# EAGLE board schemat (EAGLE 8.4.2)
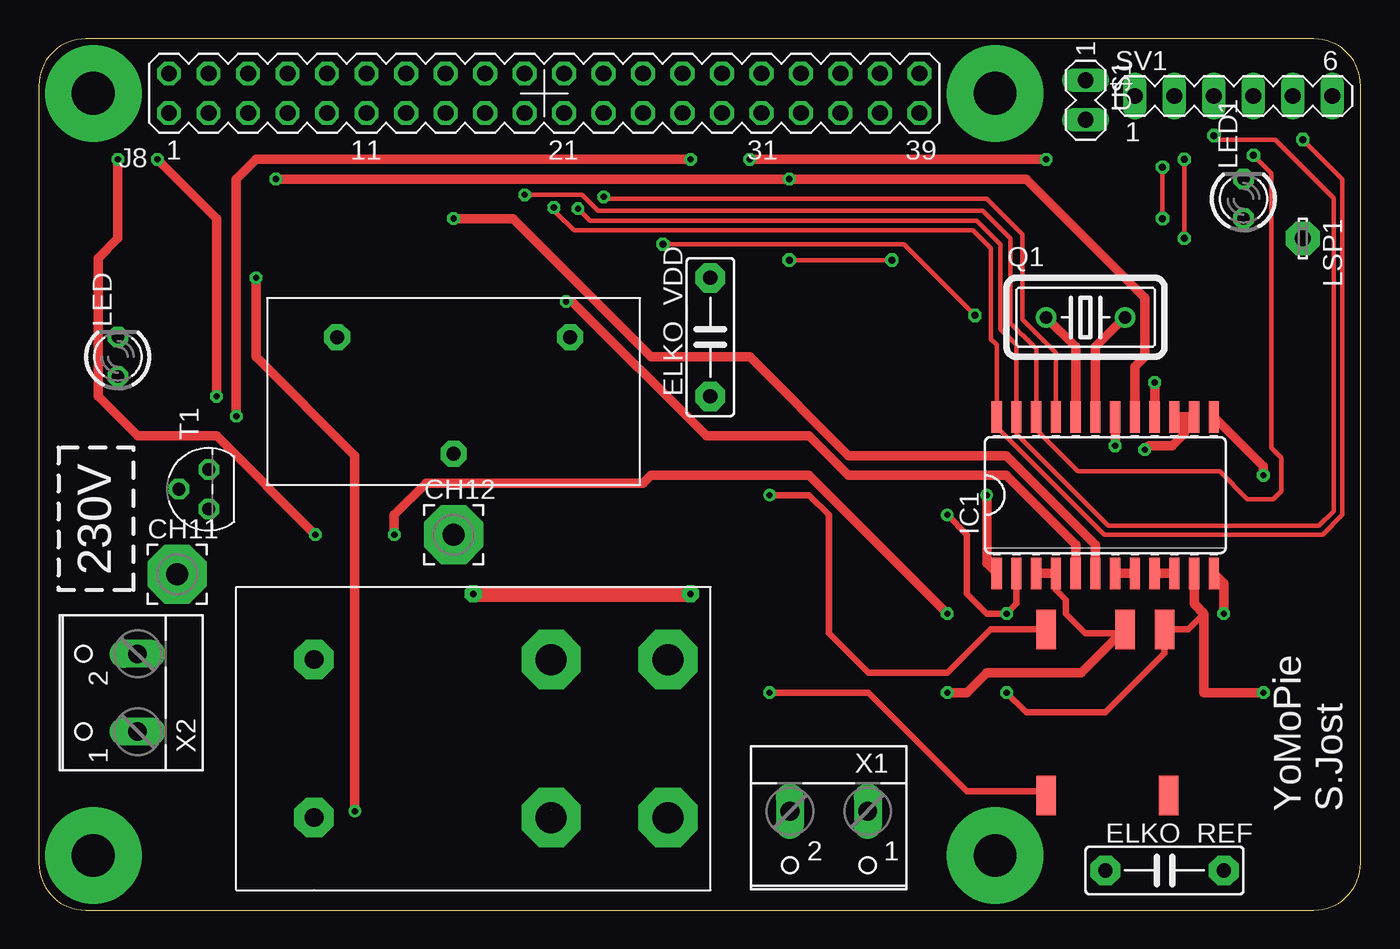
[diagram p0: board, top side]
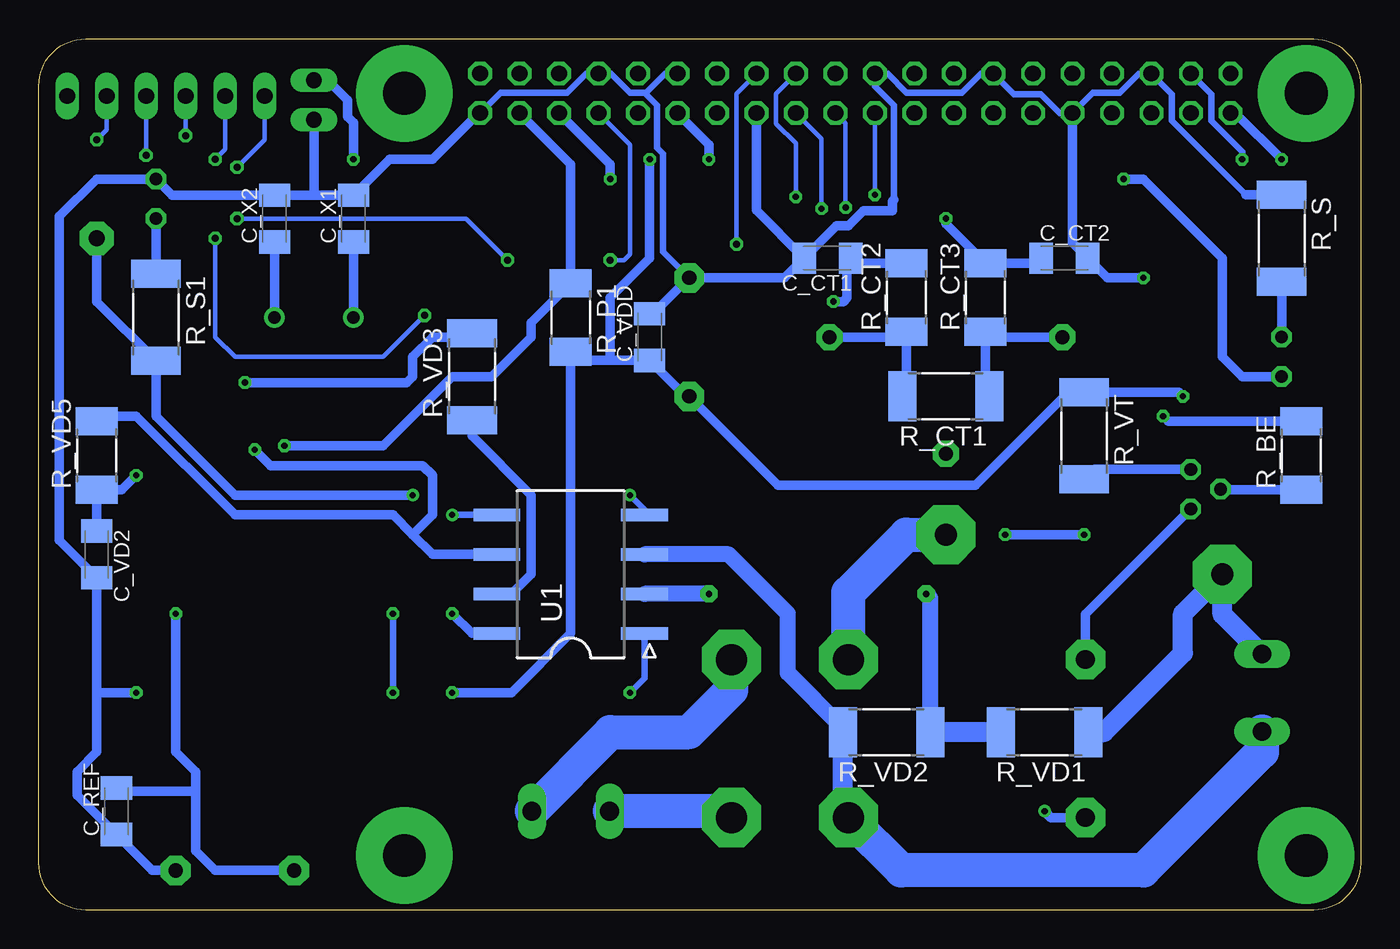
[diagram p1: board, bottom side, seen from below]

Size 85 x 56 mm. Coordinates in mm from the lower left corner, seen from the top.
Copper layers (1*16): Top 0.035mm / dielectric 1.5mm / Bottom 0.035mm
Design rules "default *": minimum track width 10mil, minimum drill 0.4mm, track to track 10mil, track to pad 10mil, pad to pad 10mil, via to via 10mil, smd to smd 6mil, copper to edge 40mil, drill to drill 6mil, minimum pad ring 10mil, minimum via ring 8mil, stop-mask expansion 4mil, vias tented up to drill 0mil, thermal gap 10mil

## Footprints (pad centres in the part's own frame; a part is rotated, then mirrored left to right if it is on the bottom)
C1206K = smd 1.5 x 2: 1 -1.5,0; 2 1.5,0
3,81/1,4 = drill 1.397 pad 3.81 octagon: 1 0,0
C7.5B3 = drill 0.914 pad 1.905 octagon: 1 -3.81,0; 2 3.81,0
SO24L = smd 0.66 x 2.032: 1 -6.985,-5.029; 2 -5.715,-5.029; 3 -4.445,-5.029; 4 -3.175,-5.029; 5 -1.905,-5.029; 6 -0.635,-5.029; 7 0.635,-5.029; 8 1.905,-5.029; 9 3.175,-5.029; 10 4.445,-5.029; 11 5.715,-5.029; 12 6.985,-5.029; 13 6.985,5.029; 14 5.715,5.029; 15 4.445,5.029; 16 3.175,5.029; 17 1.905,5.029; 18 0.635,5.029; 19 -0.635,5.029; 20 -1.905,5.029; 21 -3.175,5.029; 22 -4.445,5.029; 23 -5.715,5.029; 24 -6.985,5.029
LED3MM = drill 0.813 octagon: A -1.27,0; K 1.27,0
LSP10 = drill 1.016 pad 2.159 octagon: MP 0,0
RASPBERRY_PI_BPLUS_DIM = drill 1.016 octagon: 1 8.37,51.23; 2 8.37,53.77; 3 10.91,51.23; 4 10.91,53.77; 5 13.45,51.23; 6 13.45,53.77; 7 15.99,51.23; 8 15.99,53.77; 9 18.53,51.23; 10 18.53,53.77; 11 21.07,51.23; 12 21.07,53.77; 13 23.61,51.23; 14 23.61,53.77; 15 26.15,51.23; 16 26.15,53.77; 17 28.69,51.23; 18 28.69,53.77; 19 31.23,51.23; 20 31.23,53.77; 21 33.77,51.23; 22 33.77,53.77; 23 36.31,51.23; 24 36.31,53.77; 25 38.85,51.23; 26 38.85,53.77; 27 41.39,51.23; 28 41.39,53.77; 29 43.93,51.23; 30 43.93,53.77; 31 46.47,51.23; 32 46.47,53.77; 33 49.01,51.23; 34 49.01,53.77; 35 51.55,51.23; 36 51.55,53.77; 37 54.09,51.23; 38 54.09,53.77; 39 56.63,51.23; 40 56.63,53.77 | drill 2.75 pad 6.2: PE_BL 3.5,3.5; PE_BR 61.5,3.5; PE_TL 3.5,52.5; PE_TR 61.5,52.5
HC18U-V = drill 0.813: 1 -2.54,0; 2 2.54,0
R2010 = smd 1.8 x 2.7: 1 -2.2,0; 2 2.2,0
R2512 = smd 1.8 x 3.2: 1 -2.8,0; 2 2.8,0
MA06-1 = drill 1.016 long: 1 -6.35,0; 2 -3.81,0; 3 -1.27,0; 4 1.27,0; 5 3.81,0; 6 6.35,0
TO92 = drill 0.813 octagon: 1 1.27,0; 2 0,1.905; 3 -1.27,0
DIP8-GULLWING = smd 0.8 x 3: 1 -3.81,-4.753; 2 -1.27,-4.753; 3 1.27,-4.753; 4 3.81,-4.753; 5 3.81,4.753; 6 1.27,4.753; 7 -1.27,4.753; 8 -3.81,4.753
2-PINHEAD = drill 1.016 long: 1 -1.27,0; 2 1.27,0
CST1020 = drill 0.9 pad 1.676 octagon: 1 7.5,0; 2 -7.5,0; P$3 0,-7.5
0511 = smd 1.27 x 2.54: +VIN -1.27,-5.334; +VOUT 3.81,5.334; -VIN -3.81,-5.334; -VOUT 3.81,-5.334; P$6 -4.064,5.334
G4W-2212P-US-TV5 = drill 2 pad 3.81 octagon: 1 27.76,14.83; 2 27.76,4.67; 3 20.24,14.83; 4 20.24,4.67 | drill 1.2 pad 2.54 octagon: 5 5,14.83; 6 5,4.67
W237-102 = drill 1.194 long: 1 -2.5,-1.27; 2 2.5,-1.27

## Placement (x,y rotation side)
C_CT1  33n  [C1206K]  34.29,41.91 180 bottom
C_CT2  33n  [C1206K]  19.05,41.91 0 bottom
C_REF  100n  [C1206K]  80.01,6.35 90 bottom
C_VD2  33n  [C1206K]  81.28,22.86 270 bottom
C_VDD  100n  [C1206K]  45.72,36.83 90 bottom
C_X1  22p  [C1206K]  64.77,44.45 90 bottom
C_X2  22p  [C1206K]  69.85,44.45 90 bottom
CH11  WIREPAD3,81/1,4  [3,81/1,4]  8.89,21.59 0 top
CH12  WIREPAD3,81/1,4  [3,81/1,4]  26.67,24.13 0 top
ELKO_REF  10u  [C7.5B3]  72.39,2.54 0 top
ELKO_VDD  10u  [C7.5B3]  43.18,36.83 90 top
IC1  ADE7754  [SO24L]  68.58,26.67 0 top
LED  [LED3MM]  5.08,35.56 90 top
LED1  [LED3MM]  77.47,45.72 90 top
LSP1  LSP10  [LSP10]  81.28,43.18 270 top
PCB1  RASPBERRY_PI_B+_DIM  [RASPBERRY_PI_BPLUS_DIM]  0,0 0 top
Q1  [HC18U-V]  67.31,38.1 0 top
R_BE  1k  [R2010]  3.81,29.21 90 bottom
R_CT1  26  [R2512]  26.67,33.02 180 bottom
R_CT2  1k  [R2010]  29.21,39.37 90 bottom
R_CT3  1k  [R2010]  24.13,39.37 90 bottom
R_P1  100k  [R2010]  50.8,38.1 270 bottom
R_S  2k2  [R2512]  5.08,43.18 270 bottom
R_S1  825  [R2512]  77.47,38.1 270 bottom
R_VD1  1M  [R2512]  20.32,11.43 180 bottom
R_VD2  810  [R2512]  30.48,11.43 180 bottom
R_VD3  5k6  [R2512]  57.15,34.29 90 bottom
R_VD5  1k  [R2010]  81.28,29.21 90 bottom
R_VT  20  [R2512]  17.78,30.48 270 bottom
SV1  [MA06-1]  76.83,52.32 0 top
T1  2N3904  [TO92]  10.92,27.05 90 top
U1  AMC1100DUB  [DIP8-GULLWING]  50.8,21.59 90 bottom
U$1  2-PINHEAD  [2-PINHEAD]  67.31,52.07 270 top
U$2  CST-1020  [CST1020]  26.67,36.83 0 top
U$3  TES1-0511  [0511]  68.58,12.7 180 top
U$4  G4W-2212P-US-TV5  [G4W-2212P-US-TV5]  12.7,1.27 0 top
X1  [W237-102]  50.8,5.08 180 top
X2  [W237-102]  5.08,13.97 90 top

## Library data of the parts
C_CT1 C_CT2 C_REF C_VD2 C_VDD C_X1 C_X2 R_BE R_CT1-R_CT3 R_P1 R_S R_S1 R_VD1-R_VD3 R_VD5 R_VT = resistor
CH11 CH12 = wirepad
ELKO_REF ELKO_VDD = capacitor-wima
IC1 = ADE7754
LED LED1 = led
LSP1 = solpad
PCB1 = RASPBERRY_PI_Bplus-eagle5
Q1 = crystal; OC_FARNELL: unknown; OC_NEWARK: unknown
SV1 = con-lstb; OC_FARNELL: unknown; OC_NEWARK: unknown
T1 = transistor
U1 = _hhn_AMC1100_ISO7240_ADS130
U$1 = 2-PINHEAD
U$2 = cst
U$3 = TES1-0511
U$4 = power_relay
X1 X2 = con-wago-500; MPN: 237-102; OC_FARNELL: unknown; OC_NEWARK: 70K9898

## Nets
3V3: PCB1.17
5V0: PCB1.2
+3V3: PCB1.1 U1.8
+5V: C_VDD.1 ELKO_VDD.1 IC1.3 IC1.4 PCB1.4 R_P1.2 R_VT.1 U$1.1 U$3.+VIN
CE: PCB1.33 SV1.1
CS: IC1.21 PCB1.24
CSE: PCB1.26 SV1.2
DIN: IC1.22 PCB1.19 SV1.4
DOUT: IC1.24 PCB1.21 SV1.5
GND: C_CT1.2 C_CT2.2 C_REF.1 C_VD2.2 C_VDD.2 C_X1.2 C_X2.2 ELKO_REF.2 ELKO_VDD.2 IC1.2 IC1.11 LED1.K PCB1.6 PCB1.9 PCB1.14 PCB1.20 PCB1.25 PCB1.30 PCB1.34 PCB1.39 R_S.1 U1.5 U$1.2 U$3.-VIN U$4.6
IRQ: IC1.18 PCB1.37 R_P1.1
N$1: C_REF.2 ELKO_REF.1 IC1.12
N$2: U$4.1 X1.1
N$3: C_VD2.1 IC1.13 R_VD5.1
N$4: R_BE.1 T1.2
N$5: U$4.2 X1.2
N$6: CH12.1 U$4.3
N$7: IC1.1 LSP1.MP R_S1.2
N$8: CH11.1 R_VD1.1 X2.2
N$9: R_VT.2 T1.1
N$10: LED1.A R_S1.1
N$11: T1.3 U$4.5
N$12: R_VD1.2 R_VD2.1 U1.2
N$13: IC1.7 IC1.8
N$14: IC1.9 IC1.10
N$17: R_CT1.2 R_CT2.1 U$2.1
N$18: SV1.6
N$26: R_VD3.1 U1.7
N$28: LED.K R_S.2
N$39: U1.1 U$3.+VOUT
N$40: U1.4 U$3.-VOUT
N$80: R_CT1.1 R_CT3.1 U$2.2
N$97: C_CT2.1 IC1.6 R_CT3.2
N$98: C_CT1.1 IC1.5 R_CT2.2
N$102: C_X1.1 IC1.20 Q1.1
N$103: C_X2.1 IC1.19 Q1.2
RELAY: PCB1.29 R_BE.2
RESET: IC1.17 LED.A PCB1.35
SCLK: IC1.23 PCB1.23 SV1.3
V2N: IC1.14 IC1.15 R_VD5.2 U1.6
V2P: IC1.16 R_VD3.2
VSP: R_VD2.2 U1.3 U$4.4 X2.1

## Tracks (layer width: path | path; a pad name or v marks a point on that pad's centre or on a via)
+3V3  (via drill 0.4)
  Top 0.61: v5.08,48.26 5.08,43.18 3.81,41.91 3.81,33.02 6.35,30.48 11.43,30.48 v17.78,24.13 | v22.86,24.13 22.86,25.4 24.89,27.43 38.86,27.43 39.37,27.94 49.53,27.94 v58.42,19.05
  Bottom 0.61: PCB1.1 8.05,51.23 v5.08,48.26 | v17.78,24.13 v22.86,24.13 | v58.42,19.05 57.15,17.78 U1.8
+5V  (via drill 0.4)
  Top 0.406: U$3.+VIN 69.6,17.78 67.31,17.78 66.04,19.05 66.04,19.94 65.41,20.57 IC1.4
  Top 0.61: v11.43,33.02 11.43,44.45 v7.62,48.26 | IC1.4 IC1.3 | v58.42,13.97 59.69,13.97 60.96,15.24 67.06,15.24 69.6,17.78 | v45.72,48.26 v64.77,48.26
  Bottom 0.406: v7.62,48.26 7.62,48.76 9.59,50.73 9.59,52.45 PCB1.4
  Bottom 0.61: v11.43,33.02 11.69,33.28 R_VT.1 18.79,33.28 24.77,27.3 37.46,27.3 ELKO_VDD.1 43.41,33.02 C_VDD.1 48.26,35.33 | v58.42,13.97 54.61,13.97 50.8,17.78 R_P1.2 50.23,35.33 48.26,35.33 | 48.26,35.33 48.26,39.37 45.72,41.91 v45.72,48.26 | v64.77,48.26 64.77,50.6 65.16,50.98 65.16,52.07 66.43,53.34 U$1.1
CE  (via drill 0.45)
  Top 0.305: v48.26,41.78 54.74,41.78 v54.86,41.78 | v72.26,44.45 v72.26,47.75
  Bottom 0.305: PCB1.33 46.99,49.21 46.99,48.26 46.99,42.16 47.37,41.78 48.13,41.78 v48.26,41.78 | v54.86,41.78 57.53,44.45 v72.26,44.45 | v72.26,47.75 70.48,49.53 SV1.1
CS  (via drill 0.4)
  Top 0.305: IC1.21 65.41,35.81 63.25,37.97 63.25,43.43 60.96,45.72 36.32,45.72
  Top 0.61: 36.32,45.72 v36.32,45.85
  Bottom 0.305: v36.32,45.85 36.32,49.28 37.59,50.55 37.59,52.49 PCB1.24
CSE  (via drill 0.45)
  Top 0.305: v40.13,42.8 55.63,42.8 v60.2,38.23 | v73.66,43.18 v73.66,48.26
  Bottom 0.305: PCB1.26 40.13,52.49 v40.13,42.8 | v60.2,38.23 62.86,35.56 72.39,35.56 73.66,36.83 v73.66,43.18 | v73.66,48.26 73.02,48.9 SV1.2
DIN  (via drill 0.4, 0.45)
  Top 0.305: 64.13,31.88 IC1.22 | 64.13,31.88 64.13,36.08 64.02,36.2 64.01,36.2 62.48,37.72 62.48,43.18 60.71,44.96 35.94,44.96 34.93,45.97 v31.24,45.97 | v78.11,48.51 79.25,47.37 79.25,29.72 79.88,29.08 79.88,26.92 79.38,26.42 77.72,26.42 75.95,28.19 66.8,28.19 64.13,30.86 64.13,31.88
  Bottom 0.305: PCB1.19 31.24,51.22 v31.24,45.97 | SV1.4 78.11,49.78 v78.11,48.51
DOUT  (via drill 0.4, 0.45)
  Top 0.305: v33.12,45.16 33.27,45.01 33.27,44.83 34.42,43.69 60.07,43.69 61.21,42.55 61.21,36.7 61.59,36.32 IC1.24 61.59,31.05 68.51,24.13 82.55,24.13 83.83,25.41 83.83,46.98 v81.28,49.53
  Bottom 0.305: v33.12,45.16 33.12,50.58 PCB1.21 | SV1.5 80.64,50.16 v81.28,49.53
GND  (via drill 0.4)
  Top 0.406: 74.93,19.05 73.91,18.03 U$3.-VIN 72.39,16.51 68.58,12.7 63.5,12.7 v62.23,13.97 | IC1.2 62.86,19.69 v62.23,19.05 60.96,19.05 59.69,20.32 59.69,24.13 v58.42,25.4
  Top 0.61: v20.32,6.35 20.32,29.21 13.97,35.56 v13.97,40.64 | v78.74,13.97 74.93,13.97 74.93,19.05 74.3,19.69 IC1.11
  Bottom 0.406: 7.38,45.98 12.13,50.73 12.13,52.45 PCB1.6 14.27,53.77 15.49,52.55 17.21,52.55 PCB1.9 19.35,51.23 20.57,52.45 22.29,52.45 PCB1.14 24.43,53.77 25.64,52.55 29.2,52.55 30.41,53.77 PCB1.20 31.23,52.95 30.01,51.73 30.01,45.66 | 45.96,52.55 46.97,52.55 48.19,53.77 PCB1.34 49.83,53.77 51.04,52.55 55.31,52.55 PCB1.39 | PCB1.30 44.75,53.77 45.96,52.55 | v62.23,13.97 v62.23,19.05 | v58.42,25.4 U1.5 | 45.96,52.55 45.96,52.45 45.25,51.73 45.25,49.01 44.86,48.62 44.86,42.32 ELKO_VDD.2
  Bottom 0.61: 67.31,45.95 C_X1.2 62.46,48.26 59.69,48.26 56.72,51.23 PCB1.39 | 67.31,45.95 C_X2.2 76.43,45.95 LED1.K 81.28,46.99 83.68,44.59 83.68,23.76 C_VD2.2 81.28,13.97 | 81.28,13.97 81.28,10.16 82.55,8.89 82.55,7.39 C_REF.1 77.7,2.54 ELKO_REF.2 | C_VDD.2 45.49,38.33 ELKO_VDD.2 37.06,40.64 C_CT1.2 | R_S.1 7.38,45.98 | PCB1.9 18.53,42.89 C_CT2.2 16.28,40.64 v13.97,40.64 | PCB1.25 38.85,44.97 C_CT1.2 | U$4.6 19.91,5.94 v20.32,6.35 | 81.28,13.97 v78.74,13.97 | 30.01,45.66 30.1,45.57 30.1,44.96 31.97,44.96 32.93,44 33.7,44 C_CT1.2 | U$1.2 67.31,45.95
IRQ  (via drill 0.4)
  Top 0.61: IC1.18 v69.22,29.84 | v69.22,29.84 69.22,29.72 v69.22,29.84
  Bottom 0.61: PCB1.37 50.8,47.94 R_P1.1 53.34,37.76 53.34,36.83 55.88,34.29 58.42,34.29 62.86,29.84 v69.22,29.84
N$1  (via drill 0.4)
  Top 0.61: v76.2,19.05 76.2,21.01 IC1.12
  Bottom 0.61: 74.93,7.62 79.78,7.62 C_REF.2 | 74.93,7.62 74.93,8.89 76.2,10.16 v76.2,19.05 | ELKO_REF.1 73.66,2.54 74.93,3.81 74.93,7.62
N$2
  Bottom 2.184: X1.1 48.26,11.39 48.26,11.43 43.18,11.43 40.46,14.15 U$4.1
N$3  (via drill 0.4)
  Top 0.61: v78.74,27.94 78.74,28.52 IC1.13
  Bottom 0.61: C_VD2.1 R_VD5.1 79.67,27.01 v78.74,27.94
N$4
  Bottom 0.61: R_BE.1 8.98,27.01 T1.2
N$5
  Bottom 2.184: U$4.2 40.87,6.35 X1.2
N$6
  Bottom 2.184: U$4.3 32.94,20.4 29.21,24.13 CH12.1
N$7  (via drill 0.4)
  Top 0.61: v60.96,26.67 60.96,22.28 IC1.1
  Bottom 0.61: v60.96,26.67 72.39,26.67 77.47,31.75 R_S1.2 81.28,39.11 LSP1.MP
N$8
  Bottom 1.27: R_VD1.1 16.51,11.43 11.43,16.51 11.43,19.05 CH11.1 8.89,19.01 X2.2
N$9
  Bottom 0.61: T1.1 17.14,28.32 R_VT.2
N$10
  Bottom 0.61: LED1.A R_S1.1
N$11
  Bottom 0.61: T1.3 17.7,19 U$4.5
N$12  (via drill 0.4 pad 1.1)
  Top 1.016: v27.94,20.32 v41.91,20.32
  Bottom 1.016: R_VD2.1 27.68,20.06 v27.94,20.32 | v41.91,20.32 U1.2
  Bottom 1.27: R_VD1.2 R_VD2.1
N$13
  Top 0.61: IC1.7 IC1.8
N$14
  Top 0.61: IC1.9 IC1.10
N$17
  Bottom 0.61: U$2.1 29.55,36.83 R_CT2.1 29.21,33.28 R_CT1.2
N$26
  Bottom 0.61: R_VD3.1 57.15,30.48 53.34,26.67 53.34,21.59 54.61,20.32 U1.7
N$28
  Bottom 0.61: LED.K R_S.2
N$39  (via drill 0.4)
  Top 0.406: v46.99,13.97 53.34,13.97 59.69,7.62 64.52,7.62 U$3.+VOUT
  Bottom 0.406: v46.99,13.97 46.05,14.91 U1.1
N$40  (via drill 0.4)
  Top 0.406: v46.99,26.67 49.53,26.67 50.8,25.4 50.8,17.78 53.34,15.24 58.42,15.24 61.21,18.03 U$3.-VOUT
  Bottom 0.406: v46.99,26.67 46.05,25.73 U1.4
N$80
  Bottom 0.61: R_CT1.1 24.13,33.02 R_CT3.1 23.79,36.83 U$2.2
N$97  (via drill 0.4)
  Top 0.61: IC1.6 67.94,23.5 62.23,29.21 52.07,29.21 45.72,35.56 39.37,35.56 30.48,44.45 v26.67,44.45
  Bottom 0.61: C_CT2.1 20.89,41.57 R_CT3.2 26.67,44.11 v26.67,44.45
N$98  (via drill 0.4)
  Top 0.61: IC1.5 66.67,23.5 62.23,27.94 52.07,27.94 49.53,30.48 42.93,30.48 34.29,39.12 v33.91,39.12
  Bottom 0.61: R_CT2.2 32.45,41.57 C_CT1.1 33.02,41.68 33.02,39.37 33.27,39.12 v33.91,39.12
N$102
  Top 0.61: IC1.20 66.67,36.2 Q1.1
  Bottom 0.61: C_X1.1 Q1.1
N$103
  Top 0.61: IC1.19 67.94,36.2 Q1.2
  Bottom 0.61: C_X2.1 Q1.2
RELAY  (via drill 0.4)
  Top 0.61: v12.7,31.75 12.7,46.99 13.97,48.26 v41.91,48.26
  Bottom 0.61: v12.7,31.75 12.36,31.41 R_BE.2 | v41.91,48.26 41.91,49.21 PCB1.29
RESET  (via drill 0.4)
  Top 0.61: IC1.17 70.48,34.93 71.12,35.56 71.12,39.37 63.5,46.99 v48.26,46.99 v15.24,46.99
  Bottom 0.61: LED.A 7.62,34.29 8.89,35.56 8.89,41.91 13.97,46.99 v15.24,46.99 | v48.26,46.99 48.26,47.94 PCB1.35
SCLK  (via drill 0.4, 0.45)
  Top 0.305: v34.67,45.09 35.43,44.32 60.33,44.32 61.85,42.8 61.85,37.34 62.86,36.32 IC1.23 62.86,30.61 68.78,24.69 82.32,24.69 83.27,25.64 83.27,45.76 79.5,49.53 75.82,49.53 v75.56,49.78
  Bottom 0.305: v34.67,45.09 34.67,49.59 PCB1.23 | SV1.3 75.56,49.91 v75.56,49.78
V2N  (via drill 0.4)
  Top 0.61: 73.66,31.7 IC1.15 | 73.66,31.7 IC1.14 | v71.12,29.59 71.37,29.84 72.9,29.84 73.66,30.61 73.66,31.7
  Bottom 0.61: U1.6 59.69,22.86 60.96,24.13 | 60.96,24.13 62.23,25.4 72.39,25.4 78.74,31.75 80.94,31.75 R_VD5.2 | 60.96,24.13 59.69,25.4 59.69,27.94 60.33,28.57 70.1,28.57 v71.12,29.59
V2P  (via drill 0.4)
  Top 0.61: IC1.16 v71.75,33.91
  Bottom 0.61: v71.75,33.91 61.34,33.91 60.96,34.29 60.96,35.56 59.69,36.83 57.41,36.83 R_VD3.2
VSP
  Bottom 1.016: R_VD2.2 33.28,11.69 36.83,15.24 36.83,19.05 40.64,22.86 U1.3
  Bottom 1.27: R_VD2.2 33.28,6.28 U$4.4
  Bottom 2.184: X2.1 6.35,10.16 13.97,2.54 29.54,2.54 U$4.4

## Text on the board
tNames: 230V | YoMoPie / S.Jost